# Altium PCB PCB2.PcbDoc
Units mil, origin at the board's own origin, x right, y up, seen from the top; angles counter-clockwise.
Board outline 3123.14 x 1468.87 mil, 2 copper layers (Top Layer, Bottom Layer); 91 components, 54 nets, 324 pads, 99 vias.
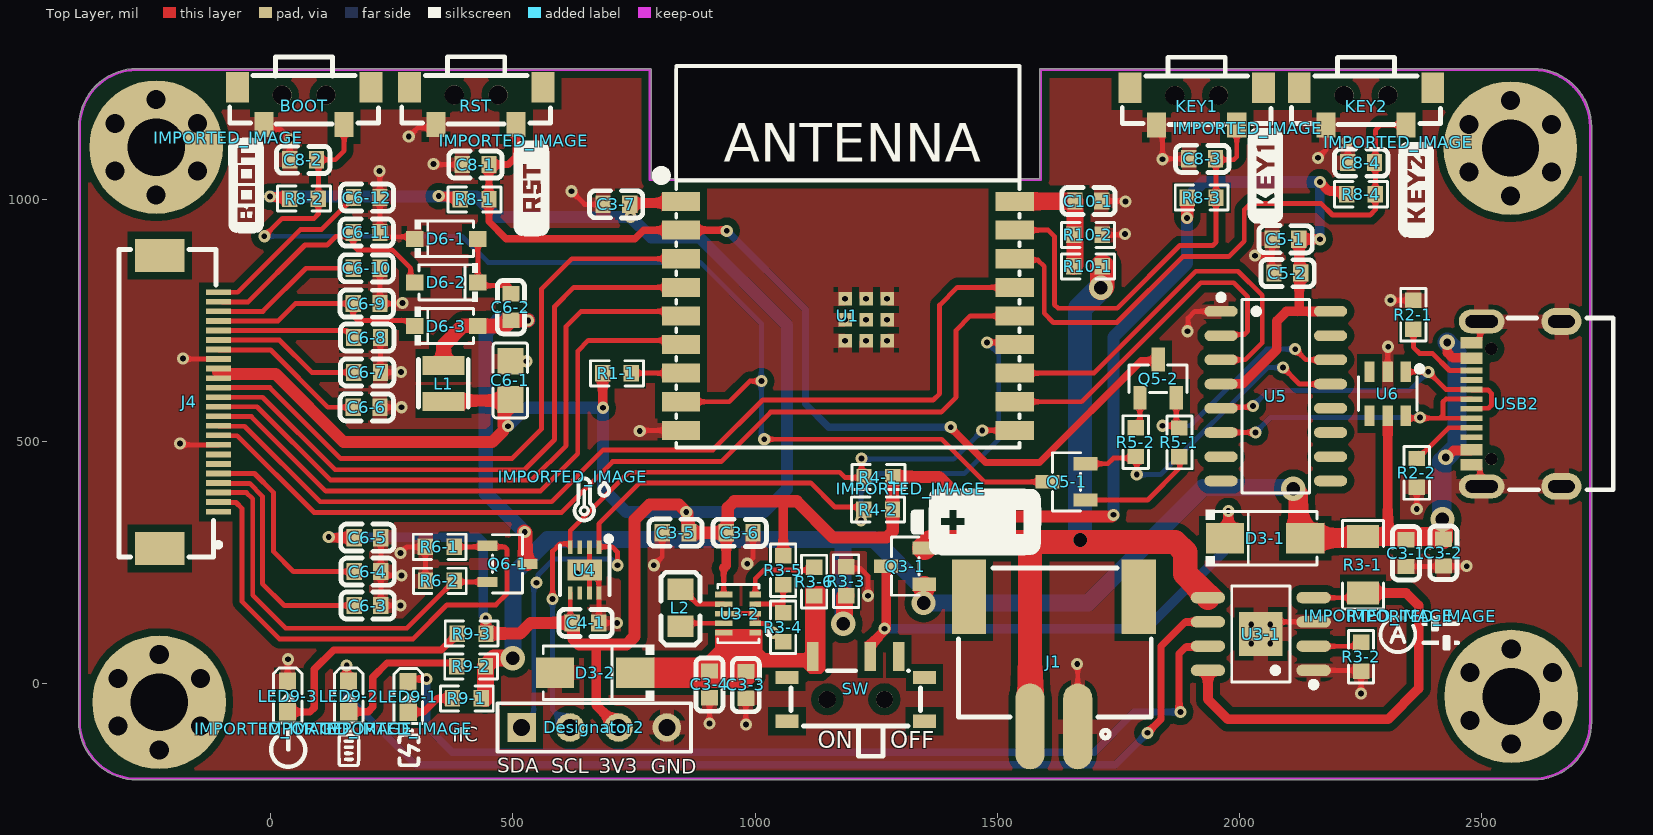
[diagram p0: Top Layer view]
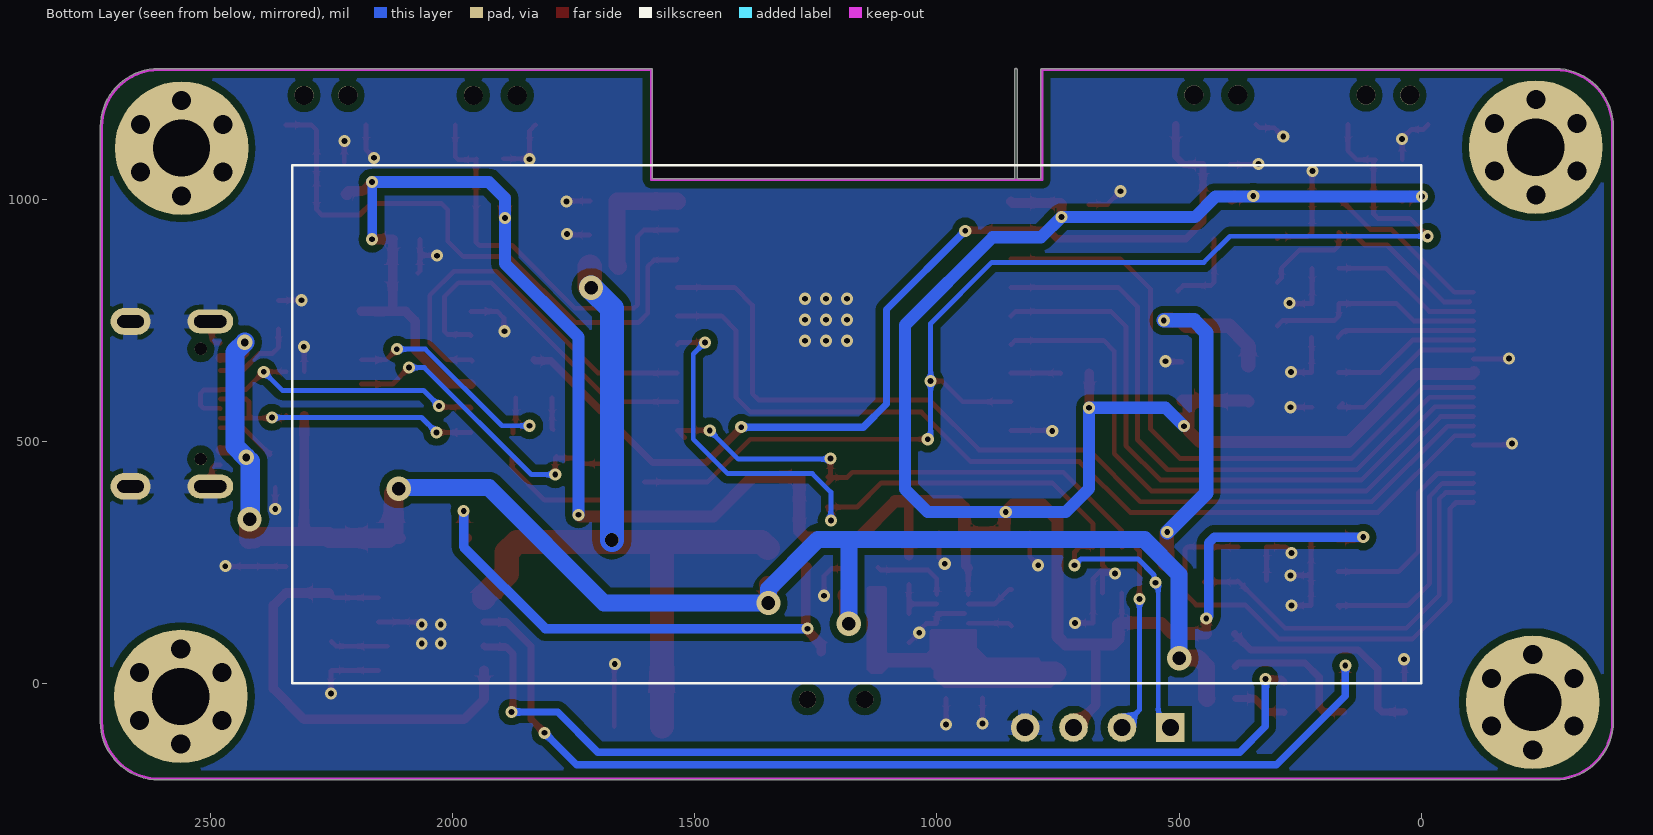
[diagram p1: Bottom Layer view, seen from below]

## Layer stack, top to bottom
Top Solder: solder mask 0.4, Solder Resist, Dk 3.5
Top Layer: signal copper 1.4
Dielectric3: dielectric 12.6, FR-4, Dk 4.8
Bottom Layer: signal copper 1.4
Bottom Solder: solder mask 0.4, Solder Resist, Dk 3.5

## Board outline
-275.59,-199.37 cw(c-275.59,-78.74) -396.22,-79.06 cw(c-393.7,-79.05) -396.22,-79.01 -396.22,1148.74 cw(c-275.59,1148.74) -276.18,1269.36 cw(c-276.16,1266.85) -276.16,1269.36 783,1269.36 cw(c783,1266.85) 785.51,1266.85 785.51,1041.52 834.49,1041.52 834.49,1267 cw(c837,1267) 839.51,1267 839.51,1041.52 1587.49,1041.52 1587.49,1266.85 cw(c1590,1266.85) 1590.07,1269.36 cw(c1590.15,1266.85) 1590.15,1269.37 2606.3,1269.37 cw(c2606.3,1148.74) 2726.92,1148.74 2726.92,-78.96 cw(c2724.41,-78.96) 2726.92,-78.99 ccw(c2606.3,-78.74) 2726.92,-78.96 ccw(c2724.41,-78.96) 2726.92,-78.96 2726.92,-78.99 cw(c2606.3,-78.74) 2606.3,-199.37 cw(c2606.3,-196.85) 2606.27,-199.37

## Design rules (kind name [scope] priority, off if disabled: settings)
Clearance [All] p1: gap=15 ignorepadtopadclearanceinfootprint=FALSE
PolygonConnect [All] p1: thpad.connectstyle=Relief thpad.reliefconductorwidth=30 thpad.reliefentries=4 thpad.polygonreliefangle="90 Angle" thpad.airgapwidth=10 smdpad.connectstyle=Relief smdpad.reliefconductorwidth=30 smdpad.reliefentries=4 smdpad.polygonreliefangle="90 Angle" smdpad.airgapwidth=10 via.connectstyle=Direct via.reliefconductorwidth=10 via.reliefentries=4 via.polygonreliefangle="90 Angle" via.airgapwidth=10
RoutingVias [All] p1: holewidth=28 width=50 viastyle="Through Hole" minholewidth=28 minwidth=50 maxholewidth=28 maxwidth=50
SolderMaskExpansion [All] p1: expansion=4
Width [All] p1: maxlimit=50 minlimit=10 preferedwidth=10
30 further rules are at their usual default settings.

## Components (designator, comment, footprint, x,y, rotation, side; value= is the part's Value field where it differs from the comment)
BOOT "UK-B0246-SP25Y" SW-SMD_UK-B0246-SP25Y 69,1192 r0 top
C3-1 "10uF" C0603 2344,269 r90 top
C3-2 "104" C0603 2421,270 r90 top
C3-3 "10uF" C0603 981,-3 r90 top
C3-4 "10uF" C0603 906,-2 r90 top
C3-5 "22uF" C0603 836,311 r0 top
C3-6 "22uF" C0603 968,311 r180 top
C3-7 "104" C0603 713.55,989 r0 top
C4-1 "104" C0603 650,125 r180 top
C5-1 "104" C0603 2095,917 r180 top
C5-2 "10uF" C0603 2099,847 r180 top
C6-1 "10uF" C0805 495,625.63 r270 top
C6-2 "104" C0603 496,777 r90 top
C6-3 "1uF" C0603 200,160.83 r180 top
C6-4 "1uF" C0603 200,230.83 r180 top
C6-5 "104" C0603 200,300.83 r0 top
C6-6 "1uF" C0603 198,570 r180 top
C6-7 "1uF" C0603 199,642 r180 top
C6-8 "1uF" C0603 199,714 r180 top
C6-9 "1uF" C0603 198,784 r180 top
C6-10 "1uF" C0603 198,857 r180 top
C6-11 "1uF" C0603 198,931 r180 top
C6-12 "1uF" C0603 198.45,1003 r180 top
C8-1 "1uF" C0603 423,1071 r0 top
C8-2 "104" C0603 67,1081 r180 top
C8-3 "104" C0603 1923,1083 r180 top
C8-4 "104" C0603 2251,1075.04 r180 top
C10-1 "10nF" C0603 1688,995.83 r180 top
D3-1 "SS22" SMA_L4.3-W2.5-LS5.0-R-RD 2053,300 r0 top
D3-2 "SS22" SMA_L4.3-W2.5-LS5.0-R-RD 670,22 r180 top
D6-1 "MBR0530W" SOD-123_L2.7-W1.7-LS3.8-RD 362.66,917.83 r0 top
D6-2 "MBR0530W" SOD-123_L2.7-W1.7-LS3.8-RD 362.66,827.83 r180 top
D6-3 "MBR0530W" SOD-123_L2.7-W1.7-LS3.8-RD 362.66,737.83 r0 top
Designator2 "Comment" HDR1X4 518,-91 r0 top
IMPORTED_IMAGE "Comment" IMPORTED_IMAGE 1321,402 r0 top
IMPORTED_IMAGE "Comment" IMPORTED_IMAGE 2328,1117 r0 top
IMPORTED_IMAGE "Comment" IMPORTED_IMAGE 2017,1146 r0 top
IMPORTED_IMAGE "Comment" IMPORTED_IMAGE 624.11,426.69 r0 top
IMPORTED_IMAGE "Comment" IMPORTED_IMAGE 502,1120 r0 top
IMPORTED_IMAGE "Comment" IMPORTED_IMAGE -87,1126 r0 top
IMPORTED_IMAGE "Comment" IMPORTED_IMAGE 2376,139 r0 top
IMPORTED_IMAGE "Comment" IMPORTED_IMAGE 2288,140 r0 top
IMPORTED_IMAGE "Comment" IMPORTED_IMAGE 262.12,-93.72 r0 top
IMPORTED_IMAGE "Comment" IMPORTED_IMAGE 138.13,-93.72 r0 top
IMPORTED_IMAGE "Comment" IMPORTED_IMAGE -2.86,-93.72 r0 top
J1 "BAT" CONN-SMD_XH2.54-2PSMD 1617,45 r180 top
J4 "FPC-24P 0.5mm 前插后掀" FPC-SMD_X05A26H24G -168,581 r270 top
KEY1 "UK-B0246-SP25Y" SW-SMD_UK-B0246-SP25Y 1911.72,1191.37 r0 top
KEY2 "UK-B0246-SP25Y" SW-SMD_UK-B0246-SP25Y 2261.27,1191.37 r0 top
L1 "22uH" IND-SMD_L2.5-W2.0_SWPA252012S 357,619 r90 top
L2 "470nH" L0805 846,156.05 r90 top
LED9-1 "RED" LED0603-RD 284,-28 r270 top
LED9-2 "RED" LED0603-RD 161,-27 r270 top
LED9-3 "RED" LED0603-RD 35,-27 r270 top
Q3-1 "AO3401" SOT-23-3_L2.9-W1.3-P1.90-LS2.4-BR 1310,242 r0 top
Q5-1 "S9014" SOT-23-3_L2.9-W1.3-P1.90-LS2.4-BR 1643,416 r0 top
Q5-2 "S9014" SOT-23-3_L2.9-W1.3-P1.90-LS2.4-BR 1832,629 r270 top
Q6-1 "AO3400" SC-59-3_L2.9-W1.5-P0.95-LS2.5-BR 489,246.83 r180 top
R1-1 "10kΩ" R0603 715,640 r180 top
R2-1 "5.1kΩ" R0603 2359,761 r90 top
R2-2 "5.1kΩ" R0603 2366,434.65 r270 top
R3-1 "0.5Ω" R1206 2255,245 r90 top
R3-2 "10kΩ" R0603 2251,55 r90 top
R3-3 "10kΩ" R0603 1188,211 r270 top
R3-4 "91kΩ" R0603 1058,116 r270 top
R3-5 "511kΩ" R0603 1058,233.65 r270 top
R3-6 "100kΩ" R0603 1122,210 r270 top
R4-1 "10K" R0603 1254.66,426 r0 top
R4-2 "10K" R0603 1254,359 r0 top
R5-1 "10kΩ" R0603 1876,497.65 r270 top
R5-2 "10kΩ" R0603 1785.91,498.09 r90 top
R6-1 "10kΩ" R0603 349,281.83 r0 top
R6-2 "0.47Ω" R0603 349.34,211.83 r0 top
R8-1 "10kΩ" R0603 421,999 r0 top
R8-2 "10kΩ" R0603 69,1001 r0 top
R8-3 "10kΩ" R0603 1922,1003 r0 top
R8-4 "10kΩ" R0603 2251,1009.83 r0 top
R9-1 "10kΩ" R0603 405,-31 r0 top
R9-2 "10kΩ" R0603 414,35 r0 top
R9-3 "10kΩ" R0603 415,103 r0 top
R10-1 "100kΩ" R0603 1687.2,860.83 r0 top
R10-2 "100kΩ" R0603 1687.2,925.83 r180 top
RST "UK-B0246-SP25Y" SW-SMD_UK-B0246-SP25Y 424.27,1192.37 r0 top
SW "MSK12C02" SW-TH_MSK12C02 1207.94,-11.34 r0 top
U1 "ESP32-C3-WROOM-02" BULETM-SMD_ESPRESSIF_ESP32-C3-WROOM-02-N4-4MB 1191.51,758.56 r0 top locked
U3-1 "TC4056A" SOP-8_L4.9-W3.9-P1.27-LS6.0-BL-EP 2044,102 r90 top
U3-2 "TPS63802DLAR" VSON-10_L3.0-W2.0-P0.50-BL_TI_DLA0010A 968,144 r180 top
U4 "SHT30-DIS-B10KS" DFN-8_L2.5-W2.5-P0.50-BL-EP 648.16,233.75 r180 top
U5 "CH340C" SOP-16_L10.0-W3.9-P1.27-LS6.0-BL 2075,593 r270 top
U6 "SMS05C" SOT-23-6_L2.9-W1.6-P0.95-LS2.8-BL 2306,598 r180 top
USB2 "TYPE-C16PIN" USB-SMD_TYPE-C16PIN-1 2572,577 r90 top

## Footprints (in the part's own frame and the unit in brackets; to place one, negate y for a bottom-side part, rotate by r counter-clockwise, add the part's x,y. Pads: shape width x height; smd on the part's side, far side on the other; paste and mask are expansions set on the pad)
BULETM-SMD_ESPRESSIF_ESP32-C3-WROOM-02-N4-4MB [mm]
  rect 2x1 smd paste+0 mask+0.05: 1(-8.75,6) 2(-8.75,4.5) 3(-8.75,3) 4(-8.75,1.5) 5(-8.75,0) 6(-8.75,-1.5) 7(-8.75,-3) 8(-8.75,-4.5) 9(-8.75,-6) 10(8.75,-6) 11(8.75,-4.5) 12(8.75,-3) 13(8.75,-1.5) 14(8.75,0) 15(8.75,1.5) 16(8.75,3) 17(8.75,4.5) 18(8.75,6)
  rect 0.7x0.7 smd paste+0 mask+0.05: 19(-0.14,-1.3) 19(-0.14,-0.2) 19(-0.14,0.9) 19(0.96,-1.3) 19(0.96,-0.2) 19(0.96,0.9) 19(2.06,-1.3) 19(2.06,-0.2) 19(2.06,0.9)
  silkscreen extent -10.03,-6.9 9,13.1
C0603 [mm]
  rect 0.8x0.9 smd paste+0 mask+0.051: 1(-0.7,0) 2(0.7,0)
  silkscreen extent -1.41,-0.71 1.39,0.72
C0805 [mm]
  rect 1.41x1.35 smd paste-100 mask+0.051: 1(-1,0) 2(1,0)
  silkscreen extent -1.96,-0.9 1.96,0.9
CONN-SMD_XH2.54-2PSMD [mm]
  oval 1.524x4.5 smd paste+0 mask+0.05: 1(-1.25,3.4) 2(1.25,3.4)
  rect 1.8x3.9 smd paste+0 mask+0.05: 3(-4.45,-3.4) 4(4.45,-3.4)
  silkscreen extent -5.1,-4.9 5,4
DFN-8_L2.5-W2.5-P0.50-BL-EP [mm]
  rect 0.25x0.7 smd paste+0 mask+0.051: 1(-0.75,-1.2) 2(-0.25,-1.2) 3(0.25,-1.2) 4(0.75,-1.2) 5(0.75,1.2) 6(0.25,1.2) 7(-0.25,1.2) 8(-0.75,1.2)
  rect 1.8x1.1 smd paste+0 mask+0.051: 9(0,0)
  silkscreen extent -1.39,-1.77 1.3,1.3
FPC-SMD_X05A26H24G [mm]
  rect 0.3x1.3 smd paste+0 mask+0.051: 1(5.75,1.54) 2(5.25,1.54) 3(4.75,1.54) 4(4.25,1.54) 5(3.75,1.54) 6(3.25,1.54) 7(2.75,1.54) 8(2.25,1.54) 9(1.75,1.54) 10(1.25,1.54) 11(0.75,1.54) 12(0.25,1.54) 13(-0.25,1.54) 14(-0.75,1.54) 15(-1.25,1.54) 16(-1.75,1.54) 17(-2.25,1.54) 18(-2.75,1.54) 19(-3.25,1.54) 20(-3.75,1.54) 21(-4.25,1.54) 22(-4.75,1.54) 23(-5.25,1.54) 24(-5.75,1.54)
  rect 1.73x2.6 smd paste+0 mask+0.051: 25(-7.685,-1.54) 26(7.685,-1.54)
  silkscreen extent -8,-3.68 8.13,1.65
HDR1X4 [mm] "Connector; Header; 4 Position"
  rect 1.5x1.5 hole 0.9: 1(0,0)
  round 1.5 hole 0.9: 2(2.54,0) 3(5.08,0) 4(7.62,0)
  silkscreen extent -1.27,-1.27 8.89,1.27
IMPORTED_IMAGE [mil]
  silkscreen extent 0,-138 269,0
IND-SMD_L2.5-W2.0_SWPA252012S [mm]
  rect 1x2.2 smd paste+0 mask+0.051: 1(-0.95,0) 2(0.951,0)
  silkscreen extent -1.24,-1.3 1.26,1.32
L0805 [mil]
  rect 44.59x54.21 smd paste-3937.01 mask+2: 1(-38.05,0) 2(38.04,0)
  silkscreen extent -77,-40 73,40
LED0603-RD [mm]
  rect 0.9x0.9 smd paste+0 mask+0.051: 1(-0.799,-0.003) 2(0.799,0.004)
  silkscreen extent -1.49,-0.75 1.39,0.76
R0603 [mil]
  rect 31.75x34.02 smd paste-3937.01 mask+2: 1(-29.66,0) 2(29.66,0)
  silkscreen extent -55,-26 55,26
R1206 [mil]
  rect 47.54x66.97 smd paste-3937.01 mask+2: 1(-58.22,0) 2(58.22,0)
  silkscreen extent -91,-42 91,42
SC-59-3_L2.9-W1.5-P0.95-LS2.5-BR [mm]
  rect 1.058x0.532 smd paste+0 mask+0.051: 1(1.041,-0.95) 2(1.041,0.95) 3(-1.041,0)
  silkscreen extent -0.79,-1.53 0.79,1.53
SMA_L4.3-W2.5-LS5.0-R-RD [mm]
  rect 2x1.593 smd paste+0 mask+0.051: 1(2.1,0) 2(-2.1,0)
  silkscreen extent -3.11,-1.48 2.73,1.48
SOD-123_L2.7-W1.7-LS3.8-RD [mm]
  rect 0.91x0.84 smd paste+0 mask+0.051: 1(-1.655,0) 2(1.655,0)
  silkscreen extent -1.65,-1 1.43,1
SOP-8_L4.9-W3.9-P1.27-LS6.0-BL-EP [mm]
  oval 0.6x1.8 smd paste+0 mask+0.051: 1(-1.905,-2.773) 2(-0.635,-2.773) 3(0.635,-2.773) 4(1.905,-2.773) 5(1.905,2.773) 6(0.635,2.773) 7(-0.635,2.773) 8(-1.905,2.773)
  rect 2.29x2.29 smd paste+0 mask+0.051: 9(0,0)
  silkscreen extent -2.8,-2.92 2.53,1.52
SOP-16_L10.0-W3.9-P1.27-LS6.0-BL [mm]
  oval 0.56x1.745 smd paste+0 mask+0.051: 1(-4.445,-2.873) 2(-3.175,-2.873) 3(-1.905,-2.873) 4(-0.635,-2.873) 5(0.635,-2.873) 6(1.905,-2.873) 7(3.175,-2.873) 8(4.445,-2.873) 9(4.445,2.873) 10(3.175,2.873) 11(1.905,2.873) 12(0.635,2.873) 13(-0.635,2.873) 14(-1.905,2.873) 15(-3.175,2.873) 16(-4.445,2.873)
  silkscreen extent -5.33,-3.02 5.08,1.77
SOT-23-3_L2.9-W1.3-P1.90-LS2.4-BR [mm]
  rect 1.25x0.7 smd paste+0 mask+0.051: 1(1,-0.95) 2(1,0.95) 3(-1,0)
  silkscreen extent -0.73,-1.53 0.73,1.53
SOT-23-6_L2.9-W1.6-P0.95-LS2.8-BL [mm]
  rect 0.532x1.072 smd paste+0 mask+0.051: 1(-0.95,-1.149) 2(0,-1.149) 3(0.95,-1.149) 4(0.95,1.149) 5(0,1.149) 6(-0.95,1.149)
  silkscreen extent -1.82,-1.45 1.54,0.89
SW-SMD_UK-B0246-SP25Y [mm]
  rect 1x1.3 smd paste+0 mask+0.051: 1(2.1,-0.975) 2(-2.1,-0.975)
  rect 1.2x1.6 smd paste+0 mask+0.051: 3(-3.5,0.975) 4(3.5,0.975)
  round 1 hole 1 unplated paste+0: ""(-1.15,0.575) ""(1.15,0.575)
  silkscreen extent -3.9,-0.95 3.9,2.57
SW-TH_MSK12C02 [mm]
  rect 0.6x1.524 smd paste+0 mask+0.051: 1(-2.25,1.7) 2(0.75,1.7) 3(2.25,1.7)
  rect 1.2x0.7 smd paste+0 mask+0.051: 4(-3.6,-1.7) 4(-3.6,0.6) 4(3.6,-1.7) 4(3.6,0.6)
  round 0.9 hole 0.9 unplated paste+0: ""(-1.5,-0.55) ""(1.5,-0.55)
  silkscreen extent -3.4,-3.53 3.4,0.95
USB-SMD_TYPE-C16PIN-1 [mm]
  oval 1.25x2.4 hole 0.65 slot 1.7 at 90 deg paste+0 mask+0.05: 17(-4.325,1.828) 18(4.325,1.828)
  oval 1.4x2.1 hole 0.65 slot 1.4 at 90 deg paste+0 mask+0.05: 19(-4.325,-2.353) 20(4.325,-2.353)
  rect 0.6x1.15 smd paste-100 mask+0.051: A1B12(-3.2,2.353) A4B9(-2.4,2.353) B1A12(3.2,2.353) B4A9(2.4,2.353)
  rect 0.3x1.15 smd paste-100 mask+0.051: A5(-1.25,2.353) A6(-0.25,2.353) A7(0.25,2.353) A8(1.25,2.353) B5(1.75,2.353) B6(0.75,2.353) B7(-0.75,2.353) B8(-1.75,2.353)
  round 0.65 hole 0.65 unplated paste+0: ""(-2.89,1.328) ""(2.89,1.328)
  silkscreen extent -4.5,-5.07 4.5,0.47
VSON-10_L3.0-W2.0-P0.50-BL_TI_DLA0010A [mm]
  rect 0.6x0.3 smd paste+0 mask+0.051: 1(-0.825,1) 2(-0.825,0.5) 3(-0.825,0) 4(-0.825,-0.5) 5(-0.825,-1)
  rect 0.9x0.3 smd paste+0 mask+0.051: 6(0.825,-1) 7(0.825,-0.5) 9(0.825,0.5) 10(0.825,1)
  rect 1.3x0.3 smd paste+0 mask+0.051: 8(0.625,0)
  silkscreen extent -1.62,-1.52 1.14,1.52

## Free pads (board coordinates)
  round 59.05 hole 39.37 paste+0 mask+2: 1(-321.51,1057.79) 1(-321.51,1156.22) 1(-315.23,-88.21) 1(-315.23,10.22) 1(-236.28,1008.59) 1(-236.28,1205.44) 1(-230,-137.42) 1(-230,59.43) 1(-151.05,1057.79) 1(-151.05,1156.22) 1(-144.77,-88.22) 1(-144.77,10.22) 1(2474.05,1055.79) 1(2474.05,1154.22) 1(2475.77,-76.21) 1(2475.77,22.22) 1(2559.28,1006.59) 1(2559.28,1203.44) 1(2561,-125.42) 1(2561,71.43) 1(2644.51,1055.79) 1(2644.51,1154.22) 1(2646.23,-76.22) 1(2646.23,22.22)
  round 275.59 hole 118.11 paste+0 mask+2: 2(-236.28,1107.01) 2(-230,-39) 2(2559.28,1105.01) 2(2561,-27)

## Via types
v1: diameter 25, hole 12, Top Layer to Bottom Layer, 86 vias
v2: diameter 50, hole 28, Top Layer to Bottom Layer, 6 vias
v3: diameter 24, hole 12, Top Layer to Bottom Layer, tented both sides, 4 vias
v4: diameter 32, hole 16, Top Layer to Bottom Layer, 2 vias
v5: diameter 28, hole 28, Top Layer to Bottom Layer, 1 vias

## Nets (pads, with @x,y where several pads share a name; then routed paths per layer and width w, separated by ;. In a path a pad name is that pad's centre, name@x,y a point inside that pad or via, vN(x,y) a via of type N, cw(c..) or ccw(c..) an arc to the next point about the centre after c; other vN are vias at no path point)
3V3: C3-5.2 C3-6.2 C3-7.2 C4-1.2 C5-1.1 C5-2.1 C6-1.2 C6-5.1 Designator2.3 J4.15 J4.16 L1.1 R1-1.2 R3-5.1 R4-1.2 R4-2.2 R8-1.1 R8-2.1 R8-3.1 R8-4.1 R9-3.2 U1.1 U3-2.6 U4.5 U5.4 U5.16 | length 8147.8
  Top Layer w10: U4.5 618.63,128.81 C4-1.2 ; U3-2.6 935.52,238.18
  Top Layer w20: -109,643.18 J4.16@-109,644.05 ; v1(-1,1005) -0.04,1004.04 36.3,1004.04 R8-2.1 ; v1@122.17,300.83 C6-5.1 ; v1(347,1006) 347.96,1005.04 R8-1.1@385.3,1005.04 ; R8-1.1@387,1003.51 391.34,999.17 R8-1.1 ; v1(444,134) 444.33,133.67 444.33,103.33 R9-3.2 ; 672,80 672,-45 Designator2.3 ; R1-1.2 685.34,569.65 v1(686,569) ; v1(743,963) 743,987.11 C3-7.2 744,991.89 844.13,991.89 U1.1 ; 935.52,238.18 940.45,243.1 C3-6.2 ; R3-5.1 1058,375 1059,376 ; R4-1.2@1283.98,425.67 R4-1.2 ; U5.4 1962.3,618.39 2006.39,618.39 2077,689 2077,748 2097,768 2120.5,768 ; C5-1.1 C5-1.1@2123.55,917 ; v1(2166,917) C5-1.1@2123.55,917 ; v1(2166,1035) 2184.16,1016.84 2215.47,1016.84 2217,1015.31 2217,1008 2219.52,1008 R8-4.1 ; U5.16 2120.5,768 ; 2120.5,768 2123.55,771.06 C5-1.1@2123.55,917
  Top Layer w25: -109,643.18 -104.82,639 10,639 151,498 457,498 480.93,521.93 ; L1.1 359.34,583.92 C6-1.2@492.66,583.92 ; R8-1.1@385.3,1005.04 386.84,1003.51 R8-1.1@387,1003.51 ; R9-3.2 515,103 537,125 C4-1.2 625.69,121.75 625.69,91.31 637,80 672,80 734,80 751,97 751,338 782,369 843,369 v1(858,354) 860.31,351.69 860.31,314.25 C3-5.2 C3-6.2 943.69,314.25 943.69,362.69 957,376 1059,376 1086,376 1161,301 1271,301 1284.31,314.31 1284.31,425.35 R4-1.2@1283.98,425.67 ; v1@480.93,531 C6-1.2@480.93,572.18 ; R4-1.2 1380,426 1461.68,344.32 1736.32,344.32 v1(1740,348) ; v1(1892,961) 1892,1002.65 R8-3.1
  Bottom Layer w20: v1(120,302) 427.28,302 439,290.28 439,139 v1(444,134) ; v1(2166,917) v1(2166,1035)
  Bottom Layer w25: v1(-1,1005) 425,1005 467,963 v1(743,963) 785,921 885,921 1066,740 1066,401 1019,354 v1(858,354) 734,354 686,402 v1(686,569) 528,569 v1(490,531) ; v1(1740,348) 1740,715 1892,867 v1(1892,961) 1892,1002 1925,1035 v1(2166,1035)
BAT+: J1.2 Q3-1.2 R10-1.2 U3-1.5 | length 1630.6
  Top Layer w50: Q3-1.2 1361.97,292 1567.79,292 ; J1.2 1567.79,292 ; v2(1714,817) 1716.85,819.85 R10-1.2 ; U3-1.5 1934.85,179.76 1888.26,226.34 1888.26,270.74 1867,292 1567.79,292
  Bottom Layer w50: v5(1671,296) 1671,774 v2(1714,817)
BUSY: J4.9 U1.14 | length 1958.1
  Top Layer w10: J4.9 -106.59,511.32 -68.87,511.32 89.46,353 601,353 706,458 930,458 1032,560 1384,560 1415,591 1415,729 1444.57,758.57 U1.14
C6-2_2: C6-2.2 D6-1.2 D6-2.1 | length 172.1
  Top Layer w10: D6-1.2 D6-2.1 434.51,821.13 491.91,821.13 C6-2.2@502.66,810.38
CHRG: LED9-1.1 U3-1.7 | length 1937.2
  Top Layer w15: LED9-1.1 289.39,9 v1(322,9) ; v1@1875,-59 1875,61 1889.35,75.35 1933.2,75.35 U3-1.7
  Bottom Layer w15: v1(322,9) 322,-89 375,-142 1700,-142 1783,-59 v1(1878,-59)
CLK: J4.13 U1.4 | length 1333.6
  Top Layer w10: J4.13 -16.84,590.84 133,441 524,441 586,503 586,778 625.62,817.62 U1.4
CS: J4.12 U1.5 | length 1309.2
  Top Layer w10: J4.12 -28.16,571.16 123,420 539,420 610,491 610,737 641,768 837.59,768 U1.5
D+: U5.5 U6.1 USB2.A6 USB2.B6 | length 722.5
  Top Layer w10: U5.5 1964.21,570.31 2025.3,570.31 v1(2028,573) ; U6.1 v1(2389.76,643.24) 2426.47,606.53 USB2.B6 2480.15,605.75 2513.25,605.75 2520,599 2520,573.8 2514.14,567.94 2480.15,567.94 USB2.A6
  Bottom Layer w10: v1(2028,573) 2060,605 2351.53,605 v1(2389.76,643.24)
D-: U5.6 U6.6 USB2.A7 USB2.B7 | length 659.9
  Top Layer w10: U5.6 v1(2033,518) ; U6.6 2348.69,547.47 2414.03,547.47 ; USB2.B7 2414.03,547.47 ; USB2.A7 2425.86,586.84 2420,580.99 2420,553.44 2414.03,547.47
  Bottom Layer w10: v1(2033,518) 2064,549 v1(2373,549)
DC: J4.11 U1.6 | length 1274.9
  Top Layer w10: J4.11 -106.59,550.69 -39.69,550.69 114,397 557,397 634,474 634,686 656,708 838.53,708 U1.6
EN: C8-1.2 Q5-2.3 R8-1.2 RST.1 U1.2 | length 2048.6
  Top Layer w15: RST.1 506.95,1087.95 490,1071 C8-1.2 450.55,953.44 486,918 752,918 769.73,935.73 U1.2 940.27,935.73 v1@941,935 ; v1@1405,527 1476,456 1587,456 1797,666 1829.63,666 Q5-2.3
  Bottom Layer w15: v1(941.66,934.35) 1104,772 1104,577 1152,529 v1(1404,529)
FB: R3-4.1 R3-5.2 U3-2.4 | length 118
  Top Layer w10: U3-2.4 1000.78,164 1058,164 ; R3-4.1@1058,143.65 1058,164 ; R3-5.2 1058,164
GDR: J4.2 Q6-1.1 R6-1.2 | length 1066.4
  Top Layer w10: J4.2 -106.59,373.53 -71.53,373.53 -59,361 -59,169 18,92 294,92 364,162 465,162 488,185 488,276.66 482.83,281.83 R6-1.2
GND: BOOT.2 C3-1.1 C3-2.1 C3-3.1 C3-4.1 C3-5.1 C3-6.1 C3-7.1 C4-1.1 C5-1.2 C5-2.2 C6-1.1 C6-3.1 C6-4.1 C6-5.2 C6-6.1 C6-7.1 C6-8.1 C6-9.1 C6-10.1 C6-11.1 C6-12.1 C8-1.1 C8-2.2 C8-3.2 C8-4.2 C10-1.1 D3-2.1 D6-1.1 Designator2.4 J1.1 J4.8 J4.17 KEY1.2 KEY2.2 LED9-3.1 R2-1.2 R2-2.2 R3-2.1 R3-3.1 R3-4.2 R6-1.1 R6-2.1 R10-2.1 RST.2 U1.9 U1.19 U3-1.1 U3-1.3 U3-1.9 U3-2.2 U3-2.3 U3-2.8 U4.2 U4.7 U4.8 U4.9 U5.1 U6.2 USB2.17 USB2.18 USB2.19 USB2.20 USB2.A1B12 USB2.B1A12 | length 3611.8
  Top Layer w10: v1(-187,495) -184.42,492.42 J4.8 ; v1@-180,671 -178.58,669.58 J4.17 ; BOOT.2 -3.52,1143.45 20.55,1143.45 v1(40,1124) 39.44,1123.44 C8-2.2 ; LED9-3.1 34.86,48.86 v1(36,50) ; v1(225,1058) 225.55,1057.44 C6-11.1 234.55,922 293.33,922 D6-1.1 ; C6-6.1 v1@269,570 ; C6-10.1 C6-9.1 v1@272,784 ; C6-8.1 C6-7.1 v1@269,642 ; C6-5.2 C6-4.1 ; v1(268,161) 267.83,160.83 C6-3.1 C6-4.1 ; v1(268,269) 280.83,281.83 R6-1.1 319.34,212.17 R6-2.1 ; v1(270,223) 235.38,223 C6-4.1 ; v1(285,1129) 286,1129 304,1147 334.61,1147 RST.2 ; v1(336,1072) 337,1071 C8-1.1 ; C6-1.1@494,663 526,663 v1(528,665) C6-1.1 ; v1(621,1016) 648,989 C3-7.1 ; v1(632.7,227) U4.9@641.41,227 ; U4.7 U4.9@658,230.72 ; U4.2 658,243.6 U4.9 U4.9@641.41,227 ; v1(715,125) C4-1.1 677.69,125.14 U4.8 677.69,217.1 661.04,233.76 U4.9@658,230.72 ; v1(762,521) 763.35,522.35 U1.9 ; v1(791,244) 808.45,261.44 C3-5.1 ; v1(906,-83) C3-4.1 ; U3-2.8 U3-2.3 U3-2.2 1001.26,123.54 1022.46,123.54 1030,116 1030,111.21 1056.87,84.35 R3-4.2@1058,84.35 ; v1(981,-85) C3-3.1 ; v1(984,247) 995.55,258.56 C3-6.1 ; R3-3.1 1191.66,237 1218,237 1233,222 v1(1233,181) ; v1(1665,40) 1666.21,38.79 J1.1 ; C10-1.1 1764.17,995.83 v1(1765,995) ; R10-2.1 1761.83,925.83 v1(1764,928) ; KEY1.2 1841,1141.02 v1(1841,1082) 1842,1083 C8-3.2 ; v1(1893,727) 1894,728 1894,754 1908,768 U5.1 ; v1(2032,883) 2033,884 2067.45,884 ; v3(2063.69,121.69) 2069,127 U3-1.3 ; C5-1.2 2067.45,884 ; C5-2.2 2067.45,851 2067.45,884 ; U3-1.1 2249.35,27 R3-2.1 v1(2251,-21) ; v1(2162,1085) 2178.59,1101.59 KEY2.2 ; v1(2223,1120) 2223.45,1119.56 C8-4.2 ; U6.2 2306,694 v1(2307,695) ; v1(2312,791) 2312.35,790.65 R2-1.2 ; C3-1.1 2468.44,241.44 v1(2469,242) ; v1(2366,360) R2-2.2 ; USB2.A1B12 2490.2,451.02 2497.01,444.21 2497.01,409.76 USB2.17 ; USB2.B1A12 2490.2,702.98 2497.01,709.8 2497.01,744.24 USB2.18 ; U4.9@641.41,227 648.16,227 U4.9@651.24,227 ; U4.9@651.24,227 658,233.76 U4.9@658,230.72 ; U4.9@651.24,227 654.28,227 U4.9@658,230.72
  other v1: 1036.58,104.64 270,570 269,643 -181,671 1186,707.39 1229.31,707.39 1272.61,707.39 1186,750.69 1229.31,750.69 1272.61,750.69 272,785 1186,794 1229.31,794 1272.61,794
  other v3: 2024.32,82.32 2063.69,82.32 2024.32,121.69
IO8: R1-1.1 U1.7 | length 102.6
  Top Layer w10: R1-1.1 745.11,640.46 U1.7
IO9: BOOT.1 C8-2.1 Q5-1.3 R8-2.2 U1.8 | length 2510
  Top Layer w10: v1(-13,923) 24,960 89.66,960 98.65,968.99 R8-2.2 98.65,1076.9 C8-2.1 133,1081 151.68,1099.68 BOOT.1 ; U1.8 946.4,581.4 989,624 v1(1013,624) ; v1(1019,504) 1385,504 1473,416 Q5-1.3
  Bottom Layer w10: v1(-13,923) 395,923 449,869 887,869 1013,743 v1(1013,624) 1013,510 v1(1019,504)
J4_4: C6-3.2 J4.4 | length 495.7
  Top Layer w10: J4.4 -106.59,412.9 -43.44,412.9 -17,386.46 -17,206 28.17,160.83 C6-3.2 C6-3.2@168.62,157
J4_5: C6-4.2 J4.5 | length 435.2
  Top Layer w10: J4.5 -33.36,433.36 6,394 6,272 47.17,230.83 C6-4.2
J4_18: C6-6.2 J4.18 | length 338.8
  Top Layer w10: J4.18 -106.59,688.49 -0.25,688.49 118.24,570 C6-6.2 C6-6.2@162.27,578.17
J4_19: C6-7.2 J4.19 | length 306.5
  Top Layer w10: J4.19 18.05,708.95 85,642 C6-7.2
J4_20: C6-8.2 J4.20 | length 286
  Top Layer w10: J4.20 156.81,728.64 158.73,726.72 160.7,726.72 171.44,715.97 C6-8.2
J4_22: C6-10.2 J4.22 | length 314.7
  Top Layer w10: J4.22 -15.99,768.01 73,857 C6-10.2
J4_24: C6-12.2 J4.24 | length 360.4
  Top Layer w10: J4.24 -68.14,807.38 61.34,936.86 104.75,936.86 158.17,990.28 160.14,990.28 170.89,1001.03 C6-12.2
KEY1: C8-3.1 KEY1.1 R8-3.2 U1.17 | length 905.9
  Top Layer w10: U1.17 1605.27,935.73 1618,923 1618,782 1625.5,774.5 1747.5,774.5 1877,904 1945,904 1951.66,910.65 R8-3.2 C8-3.1@1951.66,1081.9 ; C8-3.1 C8-3.1@1951.66,1081.9 ; KEY1.1 1994.4,1086.86 1988.54,1081 1952.55,1081 C8-3.1@1951.66,1081.9
KEY2: C8-4.1 KEY2.1 R8-4.2 U1.16 | length 1242.3
  Top Layer w10: U1.16 1538.68,874 1584,874 1597,861 1597,764 1616,745 1747.09,745 1883.09,881 1978,881 2010,913 2010,978 2023,991 2168,991 2192,967 2270,967 2280.65,977.65 R8-4.2 2280.65,1141.65 2291.98,1152.98 KEY2.1
L2_1: L2.1 U3-2.9 | length 92.1
  Top Layer w10: L2.1 852.31,124.31 U3-2.9
L2_2: L2.2 U3-2.7 | length 102.1
  Top Layer w10: L2.2 850.81,194.08 881.22,163.68 U3-2.7
LED9-1_2: LED9-1.2 R9-1.1 | length 111
  Top Layer w15: LED9-1.2 284.61,-59 316,-59 344,-31 R9-1.1@383.34,-31
LED9-2_2: LED9-2.2 R9-2.1 | length 303.9
  Top Layer w15: LED9-2.2 201.36,-58.48 211,-48.83 211,13 240,42 377.34,42 R9-2.1
LED9-3_2: LED9-3.2 R9-3.1 | length 464.6
  Top Layer w15: LED9-3.2 35.66,-59 81.21,-59 90,-50.21 90,29 130,69 352.48,69 385.34,101.87 R9-3.1
MOSI: J4.14 U1.3 | length 1355.3
  Top Layer w10: J4.14 -1.53,610.53 145,464 498,464 559,525 559,814 621.68,876.68 U1.3
PREVGH: C6-9.2 D6-3.1 J4.21 | length 454.3
  Top Layer w10: J4.21 15.32,748.32 51,784 C6-9.2 170.44,757.56 178.64,749.36 285.97,749.36 D6-3.1
PREVGL: C6-11.2 D6-2.2 J4.23 | length 528.1
  Top Layer w10: J4.23@-100,788.47 -99.22,787.69 -46.31,787.69 71,905 117,905 135,923 162.44,923 C6-11.2 170.44,903.56 179,895 251,895 289,857 289,836.33 D6-2.2
Q6-1_3: C6-2.1 D6-3.2 L1.2 Q6-1.3 | length 849.2
  Top Layer w30: L1.2 357,698 397,738 485.39,738 C6-2.1@496.42,749.03 ; C6-2.1 496.55,750 v1@531,750 ; v1@524,313 v1(524.66,312.35) 525.64,311.36 525.64,251.18 Q6-1.3
  Bottom Layer w30: v1(524.66,312.35) 444,393 444,724 469.34,749.35 v1(531.66,749.35)
R3-1_1: R3-1.1 U3-1.4 U3-1.8 | length 941.7
  Top Layer w10: U3-1.4 2245.22,177 R3-1.1
  Top Layer w20: U3-1.8 1934.85,-32.85 1976,-74 2307,-74 2370,-11 2370,161 2344.22,186.78 R3-1.1
R3-2_2: R3-2.2 U3-1.2 | length 119.8
  Top Layer w10: U3-1.2@2134.15,76.83 2240.35,76.83 R3-2.2@2250,86.48
R3-6_1: R3-6.1 U3-2.5 | length 164.2
  Top Layer w10: U3-2.5 1000.47,216.47 1018,234 1116.34,234 R3-6.1
R5-1_1: Q5-2.2 R5-1.1 U5.14 | length 520.6
  Top Layer w10: v1(1841,531.83) 1871.48,531.83 R5-1.1@1875.4,527.91 ; R5-1.1@1869.4,540.83 Q5-2.2 ; R5-1.1@1875.4,517.25 R5-1.1@1875.4,527.91 ; R5-1.1@1875.4,531.83 R5-1.1@1875.4,527.91 ; R5-1.1 R5-1.1@1875.4,527.91 ; v1@2116,689 2137,668 U5.14
  Bottom Layer w10: v1(1841,531.83) 1897.83,531.83 2056,690 v1(2115,690)
R5-1_2: Q5-1.1 R5-1.2 | length 261.3
  Top Layer w10: Q5-1.1 1810.43,378.6 1877,445.16 1877,465.87 1874.87,468 R5-1.2@1863.99,457.12
R5-2_1: Q5-1.2 R5-2.1 U5.13 | length 656.6
  Top Layer w10: Q5-1.2 1728.39,453.4 1739.98,465 R5-2.1@1786,465 ; R5-2.1 1785.74,468.26 1788,466 v1(1788,431) ; v1@2087.13,649.13 v1(2090,652) 2124,618 U5.13
  Bottom Layer w10: v1(1788,431) 1837,431 2058,652 v1(2090,652)
R5-2_2: Q5-2.1 R5-2.2 | length 67.1
  Top Layer w10: R5-2.2@1792,523.65 1794.6,526.25 Q5-2.1
RESE: J4.3 Q6-1.2 R6-2.2 | length 829.4
  Top Layer w10: J4.3 -49.99,393.99 -37,381 -37,182 31,114 281.17,114 R6-2.2 381.4,209.43 Q6-1.2
RST: J4.10 U1.15 | length 1998.9
  Top Layer w10: J4.10 -106.59,531.01 -54.01,531.01 102,375 580,375 687,482 913,482 1016,585 1368,585 1381,598 1381,781 1417.62,817.62 U1.15
RXD: U1.11 U5.2 | length 724.4
  Top Layer w10: U1.11 1674.4,581.4 1920,827 1988,827 2016.86,798.14 2016.86,726.86 2010.3,720.31 1964.21,720.31 U5.2
SCL: Designator2.2 R4-1.1 U1.10 U4.4 | length 1527.2
  Top Layer w10: v1@582,173 v1(582,174) 582,273 597,288 618.55,288 U4.4@618.63,287.92 ; U4.4 U4.4@618.63,287.92 ; v1(1220,464) 1220,431 R4-1.1 ; R4-1.1@1224.86,414 1213.86,425 1186,425 1175,436 739,436 618.47,315.47 618.63,315.3 U4.4@618.63,287.92 ; v1(1469,522) 1469.35,522.35 U1.10 U1.10@1521.32,507.66
  Bottom Layer w10: v1(582,174) 582,36 582,-55 Designator2.2 ; v1@1217,463 1410,463 v1(1469,522)
SDA: Designator2.1 R4-2.1 U1.13 U4.1 | length 1914
  Top Layer w10: U4.1@677.53,289.53 677.53,329.53 762,414 1115,414 1165,364 R4-2.1@1226.54,364 ; U4.1 677.69,281.92 677.77,282 705,282 716,271 v1(716,244) ; v1(1219,336) 1219,343.65 1214,348.65 R4-2.1 ; v1(1479,704) 1531.51,704 U1.13
  Bottom Layer w10: Designator2.1 543,-66 543,202 v1(549,208) 551.87,210.87 551.87,223.87 585,257 703,257 v1(716,244) ; v1(1219,336) 1219,395 1257,433 1432,433 1503,504 1503,680 v1(1479,704)
STDBY: LED9-2.1 U3-1.6 | length 2148.7
  Top Layer w15: v1(157,37) 157,8.34 LED9-2.1 ; v1@1807,-105 v1(1810,-102) 1838,-74 1838,77 1888,127 U3-1.6
  Bottom Layer w15: v1(157,37) 157,-26 299,-168 1744,-168 v1(1810,-102)
SW_2: D3-1.2 Q3-1.3 SW.2 | length 1105.9
  Top Layer w20: SW.2@1238.58,65.59 1238.58,80 1270.63,112.05 Q3-1.3 Q3-1.3@1268.22,239.59 ; D3-1.2 1977,306.68 v1(1977,356)
  Bottom Layer w20: v1(1267,113) 1808,113 1977,282 v1(1977,356)
TXD: U1.12 U5.3 | length 819.8
  Top Layer w10: U1.12 1699.46,640.46 1910,851 1997,851 2047,801 2047,703 2012,668 U5.3 U5.3@1959.6,665.69
USB2_A5: R2-2.1 USB2.A5 | length 125.8
  Top Layer w10: R2-2.1@2376.48,472.48 2431.79,527.79 USB2.A5
USB2_B5: R2-1.1 USB2.B5 | length 177.6
  Top Layer w10: R2-1.1 2359,694 2371.7,681.3 2398.18,681.3 2433.58,645.9 USB2.B5
VBAT: C10-1.2 R10-1.1 R10-2.2 U1.18 | length 261.1
  Top Layer w35: U1.18 1536.82,995.61 1660.23,995.61 C10-1.2 1660.45,863.73 R10-1.1
VIN: C3-1.2 C3-2.2 D3-1.1 Q3-1.1 R3-1.2 R3-3.2 R9-1.2 R9-2.2 U6.5 USB2.A4B9 USB2.B4A9 | length 3755.8
  Top Layer w20: D3-1.1@2105.68,300 2107.68,298 R3-1.2@2255,298 ; 2306,303.22 U6.5 ; C3-2.2@2408.97,298 C3-2.2@2420.91,309.94 ; v4(2426,466.5) 2427.35,466.5 2441.68,480.83 2477.69,480.83 USB2.A4B9 ; v4(2429,704) 2429,683 2440,672 2478.86,672 USB2.B4A9
  Top Layer w35: R9-1.2@442.66,-31 443.66,-30 R9-2.2 460.66,52 v2(500,52) ; v2(1182,123) 1184.87,125.87 1184.87,178.22 R3-3.2 ; v2(1348,166) 1348.68,166.68 1348.68,203.91 Q3-1.1
  Top Layer w40: v2(2111,402) 2121.64,391.36 2121.64,311.36 2133,300 D3-1.1 R3-1.2@2255,300 ; R3-1.2 2306,303.22 2403.75,303.22 C3-2.2@2408.97,298 ; v2(2419,339) 2420.91,337.09 2420.91,309.94 2420.91,297.64 C3-2.2
  Bottom Layer w35: v2(500,52) 500,225.03 571.97,297 1180,297 ; v2(1182,123) 1182,295 1180,297 ; v2@2108,404 1925,404 1687,166 v2(1348,166) 1348,195 1246,297 1180,297
  Bottom Layer w40: v2@2417.8,339 2417.8,458.3 v4(2426,466.5) 2449,489.5 2449,684 v4(2429,704)
VIN1: C3-3.2 C3-4.2 D3-2.2 R3-6.2 SW.1 U3-2.1 U3-2.10 | length 653.6
  Top Layer w10: 936,23.56 935.52,24.03 U3-2.10 U3-2.1
  Top Layer w20: C3-3.2@973,23.56 974.97,23.56 996.41,45 1109.6,45 1120.47,55.87 1120.47,65.59 1119.73,66.32 1119.73,179.27 R3-6.2@1119,180
  Top Layer w40: D3-2.2 756.23,25.56 C3-4.2 ; C3-4.2@906,23.56 936,23.56 C3-3.2@973,23.56
pads on no net: BOOT. BOOT.3 BOOT.4 J1.3 J1.4 J4.1 J4.6 J4.7 J4.25 J4.26 KEY1. KEY1.3 KEY1.4 KEY2. KEY2.3 KEY2.4 RST. RST.3 RST.4 SW. SW.3 SW.4 U4.3 U4.6 U5.7 U5.8 U5.9 U5.10 U5.11 U5.12 U5.15 U6.3 U6.4 USB2. USB2.A8 USB2.B8

## Polygon pours and split planes (outlines as drawn)
GND on Top Layer "GND_L01_P008" (solid, remove dead copper, pour order 8): -731,1489 -701,1519 2930,1519 2930,-268 2750,-448 2720,-418 -871,-418
GND on Bottom Layer "GND_L02_P010" (solid, remove dead copper, pour order 10): -605,1563 -739,1429 -739,-439 3389,-439 3324,-374 3324,1639

## Keep-outs
Keep-Out Layer:
  lines w5: 2605.59,1267 1590,1267 1590,1040 1589.41,1039.41 782.59,1039.41 782.59,1266.7 -276.57,1266.7 ccw(c-276,1148.59) -394.11,1148.59 -394.11,-79.2 ccw(c-276,-78.89) -276,-197 2605.89,-197 ccw(c2605.89,-78.89) 2724,-79.11 2724,1148.59 ccw(c2605.89,1148.59) 2605.89,1266.7

## Other copper
Top Layer:
  region net VIN1: 790,53 896,53 918,75 918,111 919,112 1012,112 1015,109 1015,69 1022,62 1101,62 1104,65 1104,198 1107,201 1141,201 1145,197 1145,28 1137,20 1113,20 1100,33 1014,33 1007,26 1007,12 986,-9 764,-9 754,1

## Silkscreen, mask and mechanical layers (free items; w line width, h text height)
Top Overlay:
  text "IIC" at 375,-120 h30
  text "ON     OFF" at 1129,-145 h59.05
  text "SDA" at 468,-184 h30
  text "SCL" at 579,-185 h30
  text "3V3" at 677,-185 h30
  text "GND" at 785,-186 h30
Bottom Overlay:
  lines w5: 2330.71,1069.29 2330.71,0 0,0 0,1070 2330.71,1070
Mechanical 1:
  lines w5: 837,1267 837,1039 ; 1590,1266.85 1590,1039 837,1039 ; 1590.15,1266.85 2606.3,1266.85 cw(c2606.3,1148.74) 2724.41,1148.74 2724.41,-78.96 cw(c2606.3,-78.74) 2606.3,-196.85 -275.59,-196.85 cw(c-275.59,-78.74) -393.7,-79.05 -393.7,1148.74 cw(c-275.59,1148.74) -276.16,1266.85 783,1266.85 783,1039 837,1039

## Text inside footprints (layer, text, board x,y; h text height)
U1: Top Overlay "ANTENNA" at 935.6,1076.83 h80